# Altium PCB AutoToolZeroProbe.PcbDoc
Units mm, origin at the board's own origin, x right, y up, seen from the top; angles counter-clockwise.
Board outline 40.5 x 40.5 mm, 2 copper layers (Top Layer, Bottom Layer), stack 1.671 mm thick; 12 components, 11 nets, 37 pads, 0 vias.
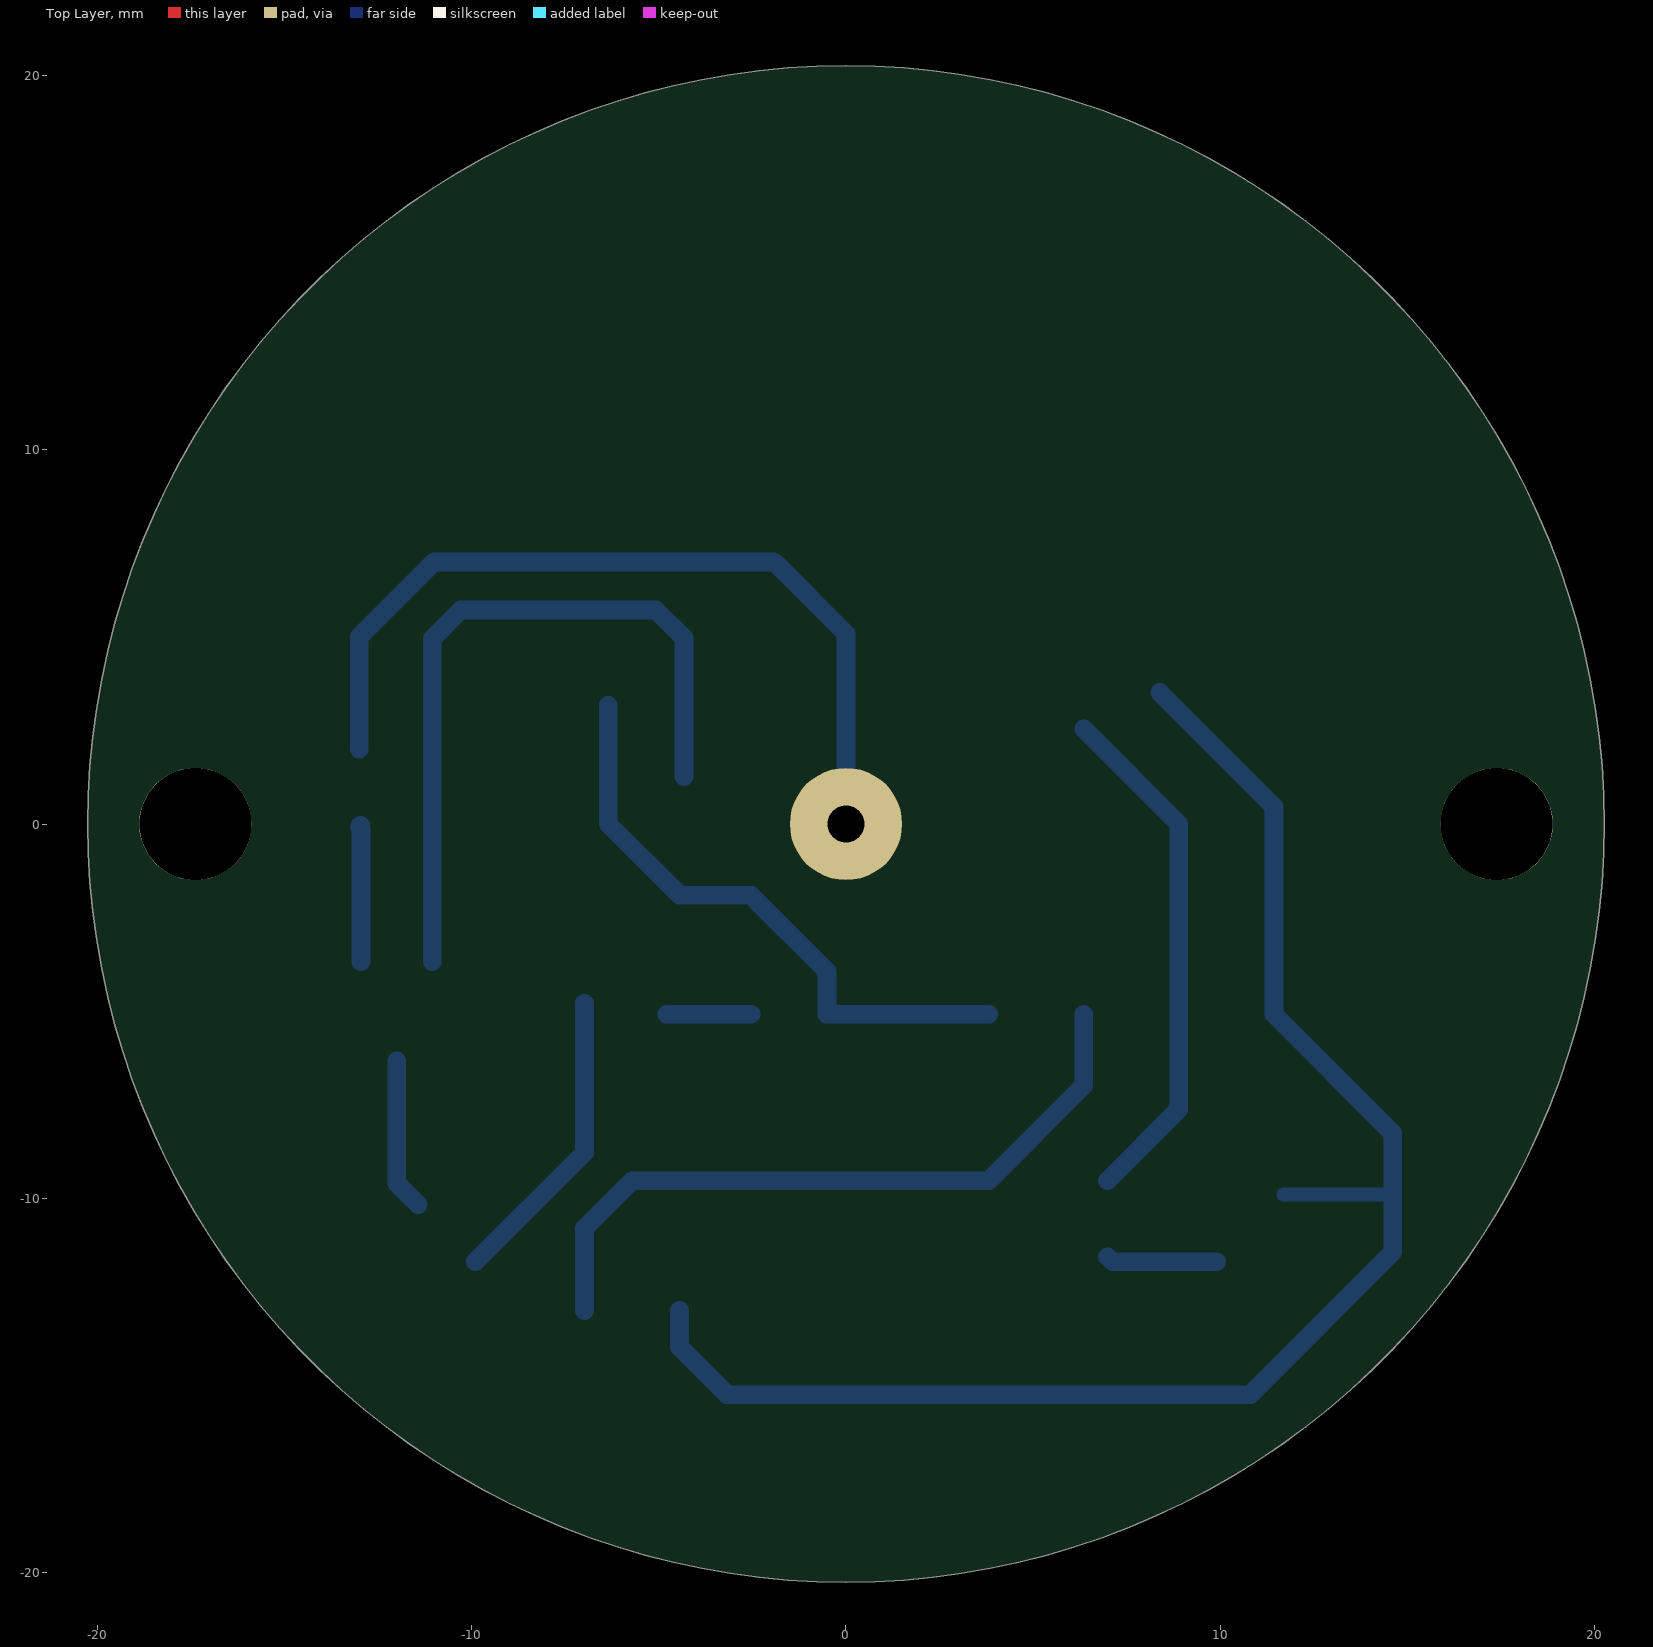
[diagram p0: Top Layer view]
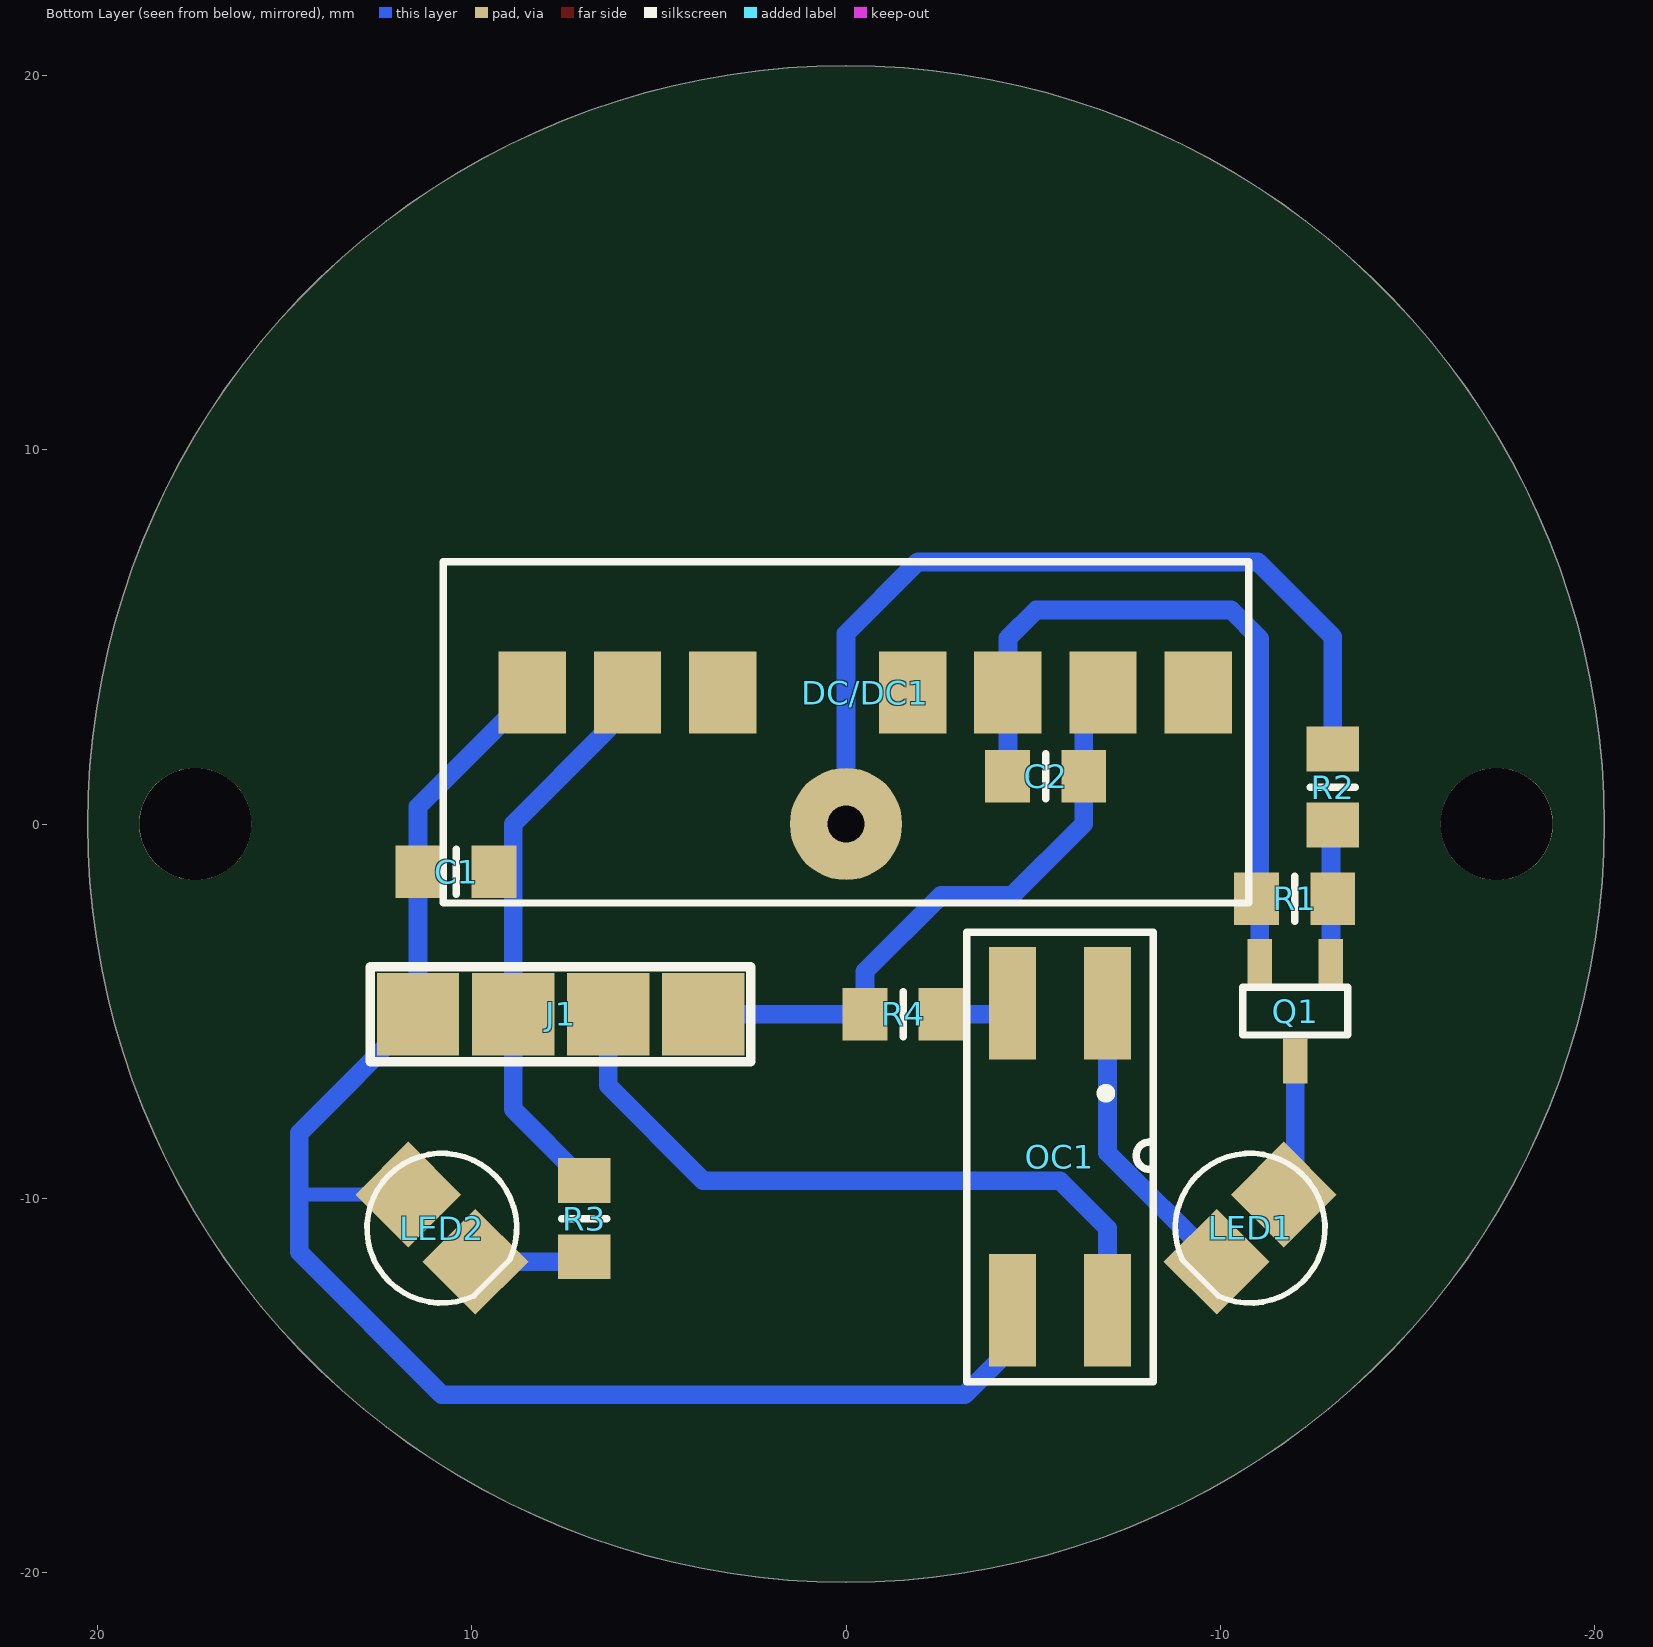
[diagram p1: Bottom Layer view, seen from below]
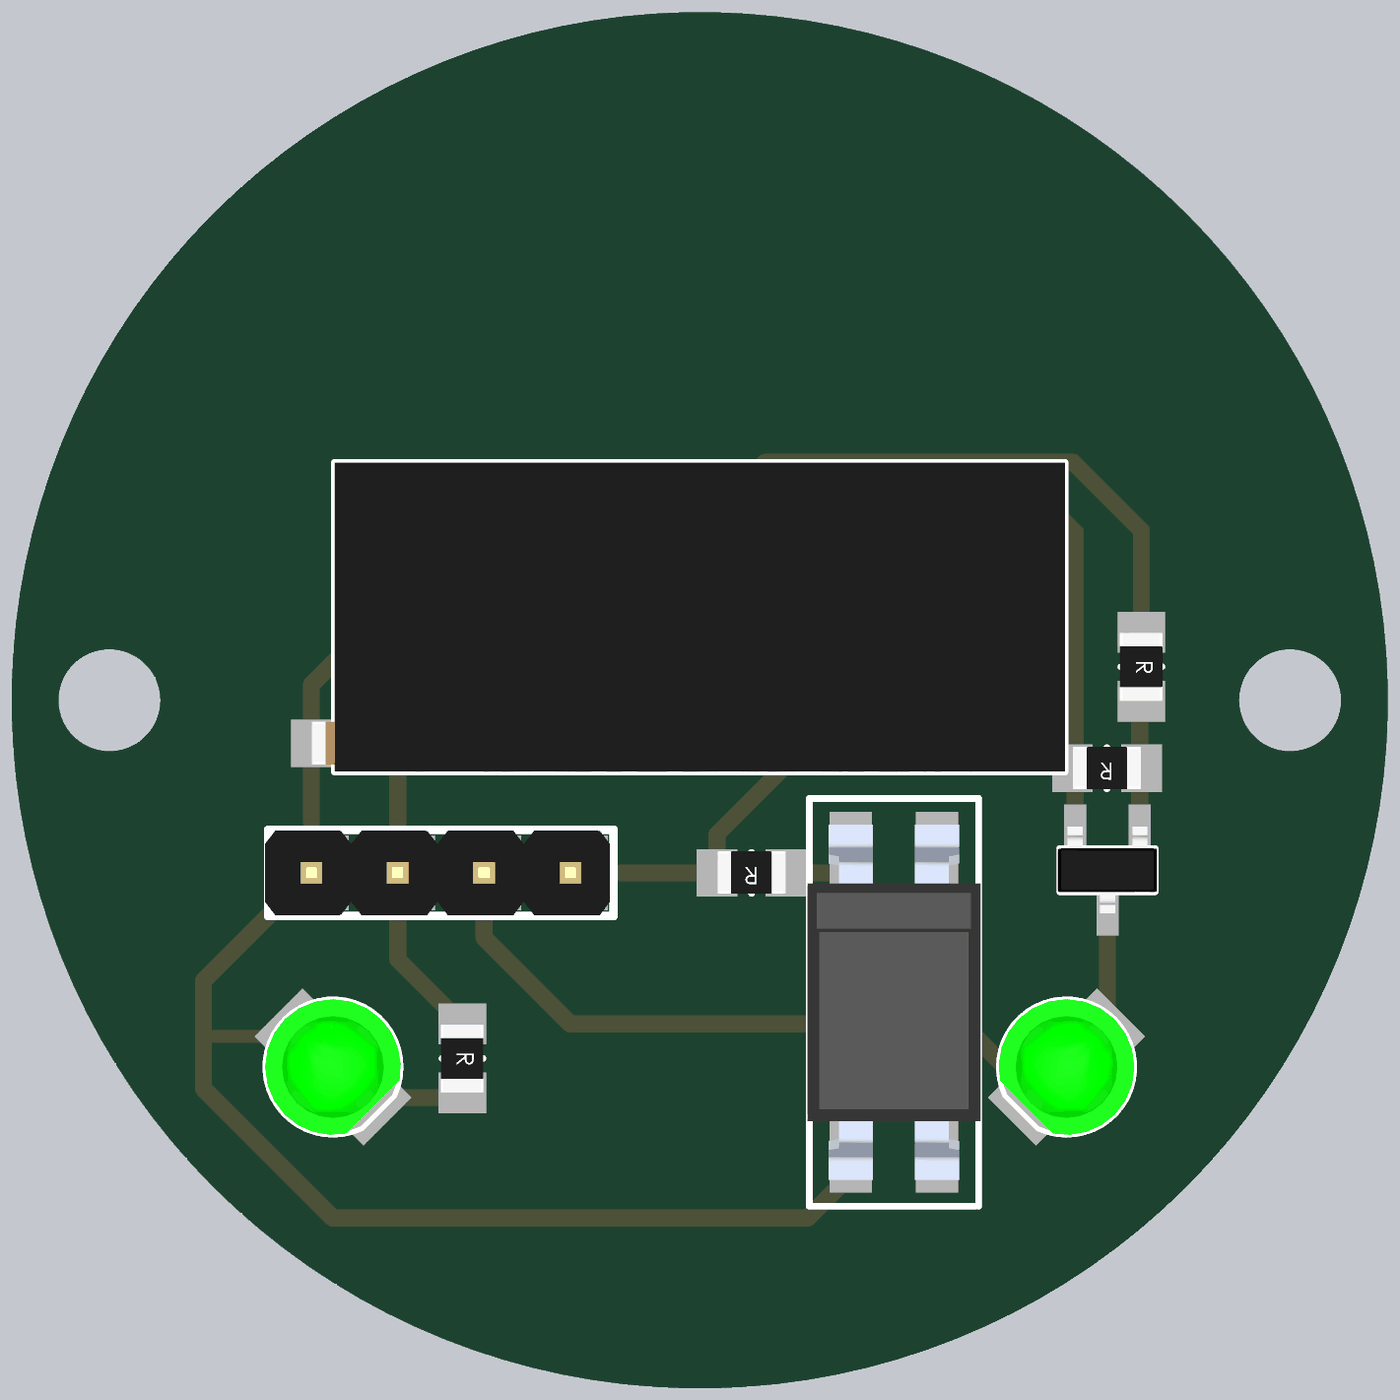
[diagram p2: 3D render of the assembled board from below, using the file's embedded part models]

## Layer stack, top to bottom
Top Solder: solder mask 0.0102, Solder Resist, Dk 3.5
Top Layer: signal copper 0.0356
Dielectric 1: dielectric 1.6, FR-4, Dk 4.8
Bottom Layer: signal copper 0.0356
Bottom Solder: solder mask 0.0102, Solder Resist, Dk 3.5

## Board outline
0,-20.25 cw(c0,0) -20.25,0 cw(c0,0) 0,20.25 cw(c0,0) 20.25,0 cw(c0,0)

## Design rules (kind name [scope] priority, off if disabled: settings)
AssemblyTestPointUsage [All] p1 off:
AssemblyTestpoint [All] p1 off: testpointundercomponent=TRUE minsize=1.016 maxsize=2.54 preferedsize=1.524 minholesize=0 maxholesize=1.016 preferedholesize=0.813 testpointgrid=0.025 usegrid=TRUE gridtolerance=0 allowsidetop=TRUE allowsidebottom=TRUE
Clearance Top_GND_Polly [InPolygon and InNet('GND_12V')] p1: gap=0.25 ignorepadtopadclearanceinfootprint=FALSE except(0: Arc-Hole Track-Hole SMDPad-Hole THPad-Hole Via-Hole Fill-Hole Poly-Hole Region-Hole Text-Hole)
Clearance [All] p2: gap=0.2 ignorepadtopadclearanceinfootprint=FALSE except(0: Arc-Hole Track-Hole SMDPad-Hole THPad-Hole Via-Hole Fill-Hole Poly-Hole Region-Hole Text-Hole)
ComponentClearance [All] p1 off: gap=0.254 collisioncheckmode=3 verticalgap=0.254 showdistances=FALSE
FabricationTestPointUsage [All] p1 off: valid=0 allowmultiple=FALSE
FabricationTestpoint [All] p1 off: side=3 testpointundercomponent=TRUE minsize=1.016 maxsize=2.54 preferedsize=1.524 minholesize=0 maxholesize=1.016 preferedholesize=0.813 testpointgrid=0.025 allowsidetop=TRUE allowsidebottom=TRUE usegrid=TRUE gridtolerance=0
Height [All] p1 off: minheight=0 maxheight=25.4 prefheight=12.7
HoleSize [All] p1: absolutevalues=TRUE maxlimit=5 minlimit=0.25 maxpercent=80.000 minpercent=20.000
HoleToHoleClearance [All] p1: gap=0.25 allowstackedmicrovias=TRUE
MinimumAnnularRing PadOutsideLayers_large [IsPad AND (PadIsPlated = 'True') AND (AsMM(HoleSize) > 0.45)] p1: minimumring=0.25
MinimumAnnularRing PadOutsideLayers_small [IsPad AND (PadIsPlated = 'True') AND (AsMM(HoleSize) <= 0.45)] p2: minimumring=0.225
MinimumAnnularRing ViaOutsideLayers_large [IsVia AND (AsMM(HoleSize) > 0.45)] p3: minimumring=0.25
MinimumAnnularRing ViaOutsideLayers_small [IsVia AND (AsMM(HoleSize) <= 0.45)] p4: minimumring=0.225
MinimumSolderMaskSliver [All] p1: minsoldermaskwidth=0.25
MinimumSolderMaskSliver SilkscreenOverComponentPads [All] p2: minsoldermaskwidth=0.254
PlaneClearance [All] p1: clearance=0.5
PlaneConnect [All] p1: planeconnectstyle=Relief reliefexpansion=0.5 reliefentries=4 reliefconductorwidth=0.25 reliefairgap=0.25
PolygonConnect [All] p1: connectstyle=Relief reliefconductorwidth=0.25 reliefentries=4 polygonreliefangle="90 Angle" airgapwidth=0.254
RoomDefinition AutoToolZeroProbe [InComponentClass('AutoToolZeroProbe')] p1: confinementstyle=ConfineIn formatcopy=TRUE lockcomponents=FALSE outline -53.006,-55.546 -2.206,-55.546 -2.206,-30.146 -53.006,-30.146
RoutingCorners [All] p1: cornerstyle=45-Degree minsetback=2 maxsetback=2
RoutingVias [All] p1: holewidth=0.3 width=0.75 viastyle="Through Hole" minholewidth=0.25 minwidth=0.65 maxholewidth=1 maxwidth=3
SilkToSilkClearance [All] p1: silktosilkclearance=0.15
SolderMaskExpansion [All] p1: expansion=0
Width [All] p1: maxlimit=10 minlimit=0.15 preferedwidth=0.3
17 further rules are at their usual default settings.

## Components (designator, comment, footprint, x,y, rotation, side; value= is the part's Value field where it differs from the comment)
C1 "=Value" "CAP 0805" 9.398,-1.27 r0 bottom
C2 "=Value" "CAP 0805" -6.35,1.27 r0 bottom
DC/DC1 "=Value" EC2SA 8.376,3.512 r180 bottom
J1 "*" SIL4 3.81,-5.08 r0 bottom
LED1 "=value" LED3G -10.795,-10.795 r315 bottom
LED2 "=value" LED3G 10.795,-10.795 r225 bottom
OC1 "TLP521-1" SOP4L -5.715,-8.89 r0 bottom
Q1 "BC807" FP_SOT23-3 -12,-5 r90 bottom
R1 "*" "RES 0805" -13,-2 r0 bottom
R2 "*" "RES 0805" -13,2 r270 bottom
R3 "*" "RES 0805" 6.985,-9.525 r270 bottom
R4 "*" "RES 0805" -2.54,-5.08 r0 bottom

## Footprints (in the part's own frame and the unit in brackets; to place one, negate y for a bottom-side part, rotate by r counter-clockwise, add the part's x,y. Pads: shape width x height; smd on the part's side, far side on the other; paste and mask are expansions set on the pad)
"CAP 0805" [mm] "0805 CAPACITOR"
  rect 1.2x1.4 smd: 1(0,0) 2(2.032,0)
  silkscreen extent 1.02,-0.6 1.02,0.6, body extent 0.02,-0.63 2.02,0.62, height 0.6
EC2SA [mm] "2W DC-DC CONVERTER"
  rect 1.8x2.2 smd: 1(0,0) 2(2.54,0) 3(5.08,0) 5(10.16,0) 6(12.7,0) 7(15.24,0) 8(17.78,0)
  silkscreen extent -2.37,-5.62 19.13,3.49, body extent -2.37,-5.62 19.13,3.49, height 11.6
FP_SOT23-3 [mm] "SOT23-3 tok"
  rect 1.2x0.65 smd: 1(1.327,-0.95) 2(1.327,0.95) 3(-1.327,0)
  silkscreen extent -0.64,-1.4 0.64,1.4, body extent -1.27,-1.46 1.27,1.46, height 0.97
LED3G [mm]
  rect 2x2 smd: 1(-1.27,0) 2(1.27,0)
  silkscreen extent -2,-2 1.88,2, body extent -2,-2 1.67,2, height 9.1
"RES 0805" [mm] "0805 Resistor"
  rect 1.2x1.4 smd: 1(0,0) 2(2.032,0)
  silkscreen extent 1.02,-0.6 1.02,0.6, body extent 0.02,-0.63 2.02,0.62, height 0.6
SIL4 [mm] "4 PIN SINGLE IN LINE CONNECTOR"
  rect 2.2x2.2 smd: 1(0,0) 2(2.54,0) 3(5.08,0) 4(7.62,0)
  silkscreen extent -1.27,-1.27 8.89,1.27, body extent -1.17,-1.25 8.99,1.25, height 8.3
SOP4L [mm]
  rect 1.25x3 smd: 1(-1.27,-4.1) 2(1.27,-4.1) 3(1.27,4.1) 4(-1.27,4.1)
  silkscreen extent -2.49,-6 2.49,6, body extent -2.55,-5.23 2.55,5.23, height 4.6

## Part data
C1 C2: library part CAP, "NON POLARIZED CAPACITOR"
DC/DC1: library part EC2SA, "2W DC-DC CONVERTER"
J1: library part HEADER4, "4 PIN HEADER"
LED1 LED2: library part LED, "SMD, 0805 LED"
OC1: library part TLP521, "photocoupler"
Q1: "PNP Transistor", Name="BC807-25  Bipolar (BJT) Single Transistor, PNP, 45 V, 100 MHz", Reference=1081221, Supplier=Farnell
R1 R2 R3 R4: library part RES, "RESISTOR"

## Free pads (board coordinates)
  round 3 hole 3 unplated: ""(-17.375,0) ""(17.375,0)
  round 3 hole 1 unplated: ""(0,0)

## Nets (pads, with @x,y where several pads share a name; then routed paths per layer and width w, separated by ;. In a path a pad name is that pad's centre, name@x,y a point inside that pad or via, vN(x,y) a via of type N, cw(c..) or ccw(c..) an arc to the next point about the centre after c; other vN are vias at no path point)
NetC1_1: C1.1 DC/DC1.2 J1.3 R3.1 | length 13.9
  Bottom Layer w0.5: DC/DC1.2@6.35,2.54 8.89,0 J1.3 8.89,-7.62 R3.1
NetC1_2: C1.2 DC/DC1.1 J1.4 LED2.1 OC1.3 | length 42.6
  Bottom Layer w0.381: LED2.1 14.605,-9.897
  Bottom Layer w0.5: OC1.3 -4.445,-13.97 -3.175,-15.24 10.795,-15.24 14.605,-11.43 14.605,-9.897 14.605,-8.255 J1.4 C1.2 11.43,0.458 DC/DC1.1
NetC2_1: C2.1 DC/DC1.7 J1.1 R4.2 | length 16.1
  Bottom Layer w0.5: DC/DC1.7@-6.35,3.175 C2.1 -6.35,0 -4.445,-1.905 -2.54,-1.905 -0.508,-3.937 R4.2 J1.1
NetC2_2: C2.2 DC/DC1.6 Q1.2 R1.2 | length 19.7
  Bottom Layer w0.5: Q1.2 -11.05,4.95 -10.285,5.715 -5.08,5.715 -4.324,4.959 DC/DC1.6 C2.2@-4.324,1.27
NetJ1_2: J1.2 OC1.4 | length 19
  Bottom Layer w0.5: OC1.4 -6.985,-10.795 -5.715,-9.525 3.81,-9.525 6.35,-6.985 J1.2
NetLED1_1: LED1.1 Q1.3 | length 4.1
  Bottom Layer w0.5: Q1.3 -12,-9.59 LED1.1 LED1.1@-11.43,-10.16
NetLED1_2: LED1.2 OC1.1 | length 8.1
  Bottom Layer w0.5: LED1.2 -6.985,-8.781 OC1.1
NetLED2_2: LED2.2 R3.2 | length 3
  Bottom Layer w0.5: R3.2 7.121,-11.693 LED2.2
NetOC1_2: OC1.2 R4.1 | length 2.2
  Bottom Layer w0.5: OC1.2@-4.79,-5.08 R4.1
NetQ1_2: Q1.1 R1.1 R2.2 | length 3.7
  Bottom Layer w0.5: R2.2@-12.968,-0.032 -13,-0.064 -12.95,-0.114 Q1.1
Probe: pad.@0,0 R2.1 | length 22.7
  Bottom Layer w0.5: R2.1 -13,5 -11,7 -1.92,7 0,5.08 pad.@0,0
pads on no net: DC/DC1.3 DC/DC1.5 DC/DC1.8

## Polygon pours and split planes (outlines as drawn)
no net on Mechanical 1 (solid): 15.574,6.684

## Silkscreen, mask and mechanical layers (free items; w line width, h text height)
Mechanical 1:
  circle w0.1: c0,0 r2.5
  circle w0.1: c17.375,0 r1.5
  circle w0.1: c-17.375,0 r1.5
  lines w0.1: -11.5,13.191 ccw(c0,0) -16.771,5 ccw(c-13.869,4.238) -15.781,1.926 cw(c-17.375,0) -15.781,-1.926 ccw(c-13.869,-4.238) -16.771,-5 ccw(c0,0) 16.771,-5 ccw(c13.869,-4.238) 15.781,-1.926 cw(c17.375,0) 15.781,1.926 ccw(c13.869,4.238) 16.771,5 ccw(c0,0) 11.5,13.191 ; -5.333,16.668 cw(c0,0) 5.333,16.668 ; -2.697,-17.291 -2.697,-9.63 ccw(c0,0) 4.495,-8.933 8.114,-15.505 ; -11.5,4.668 11.5,4.668 11.5,16.668 -11.5,16.668 -11.5,4.668
  lines w0.15: -12.7,-12.7 0,0 12.7,-12.7
Mechanical 2:
  circle w0.1: c0,0 r20.25
Mechanical 13:
  circle w0.1: c0,0 r20.25